# EAGLE board TMP006 Breakout Panel v10 (EAGLE 6.4), part 1 of 2
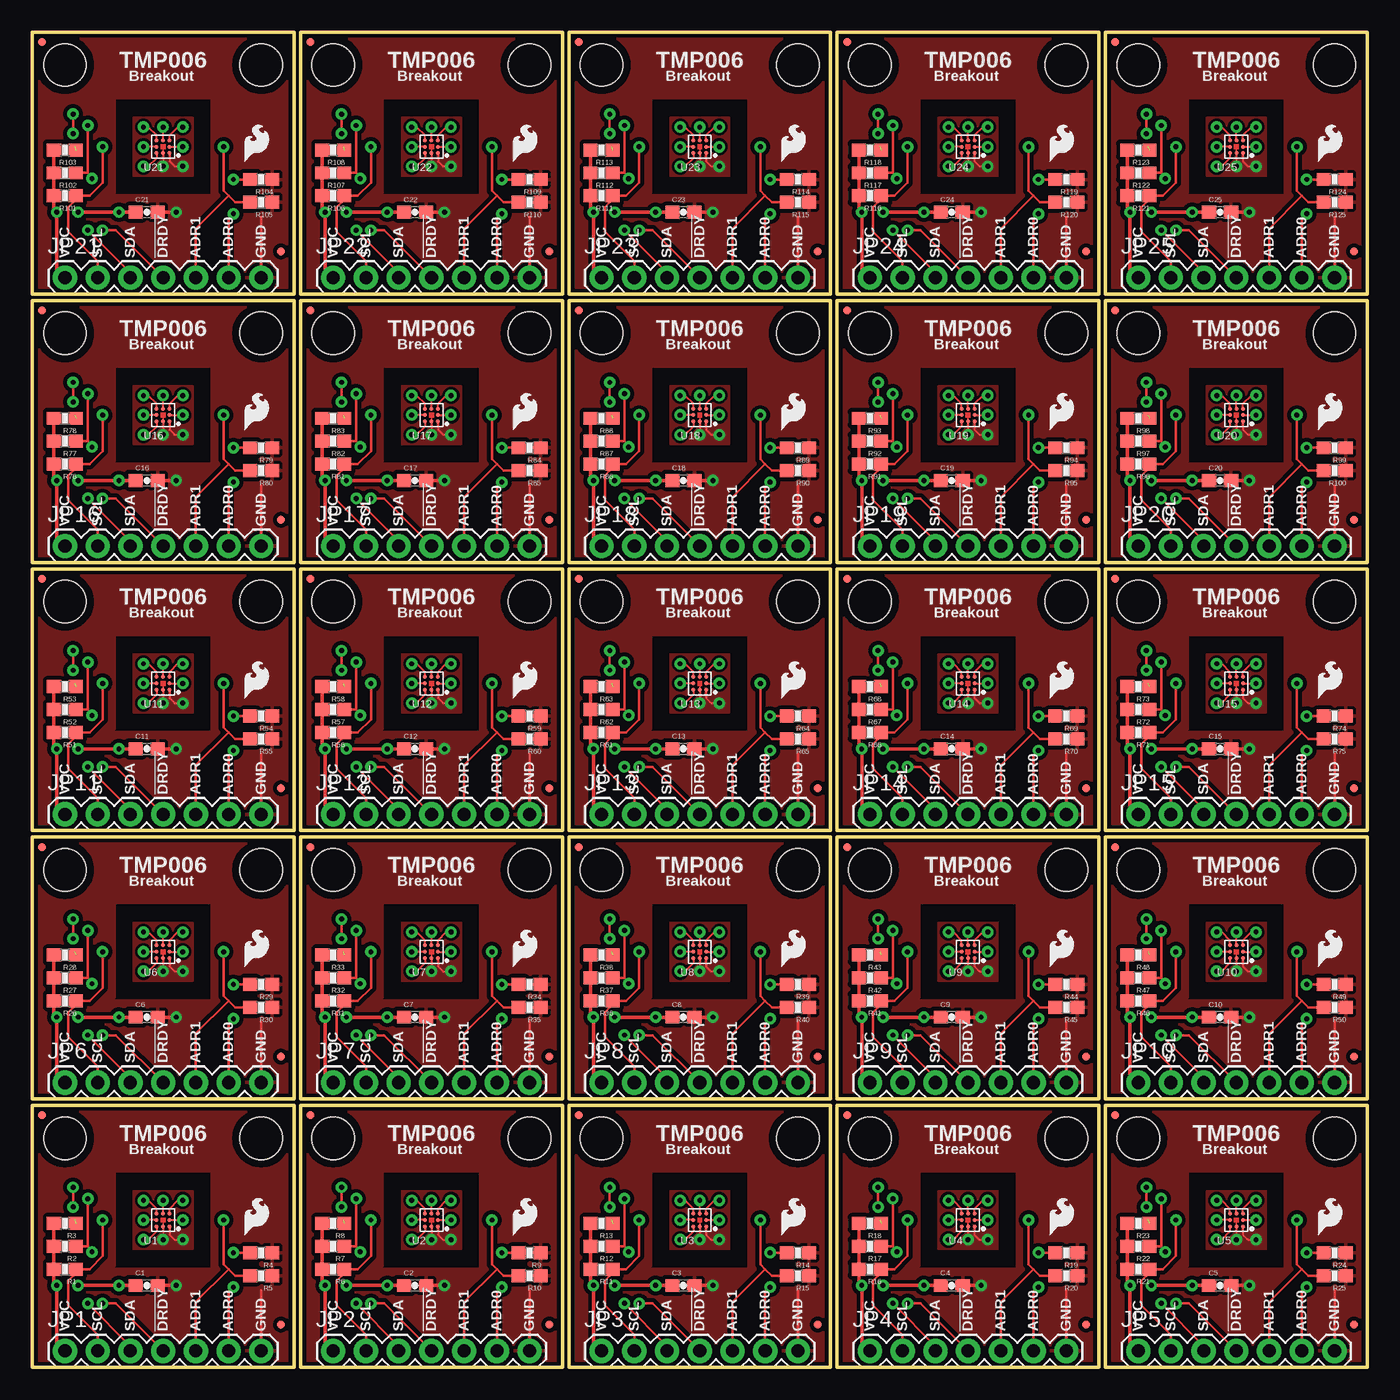
[diagram p0: board, top side]
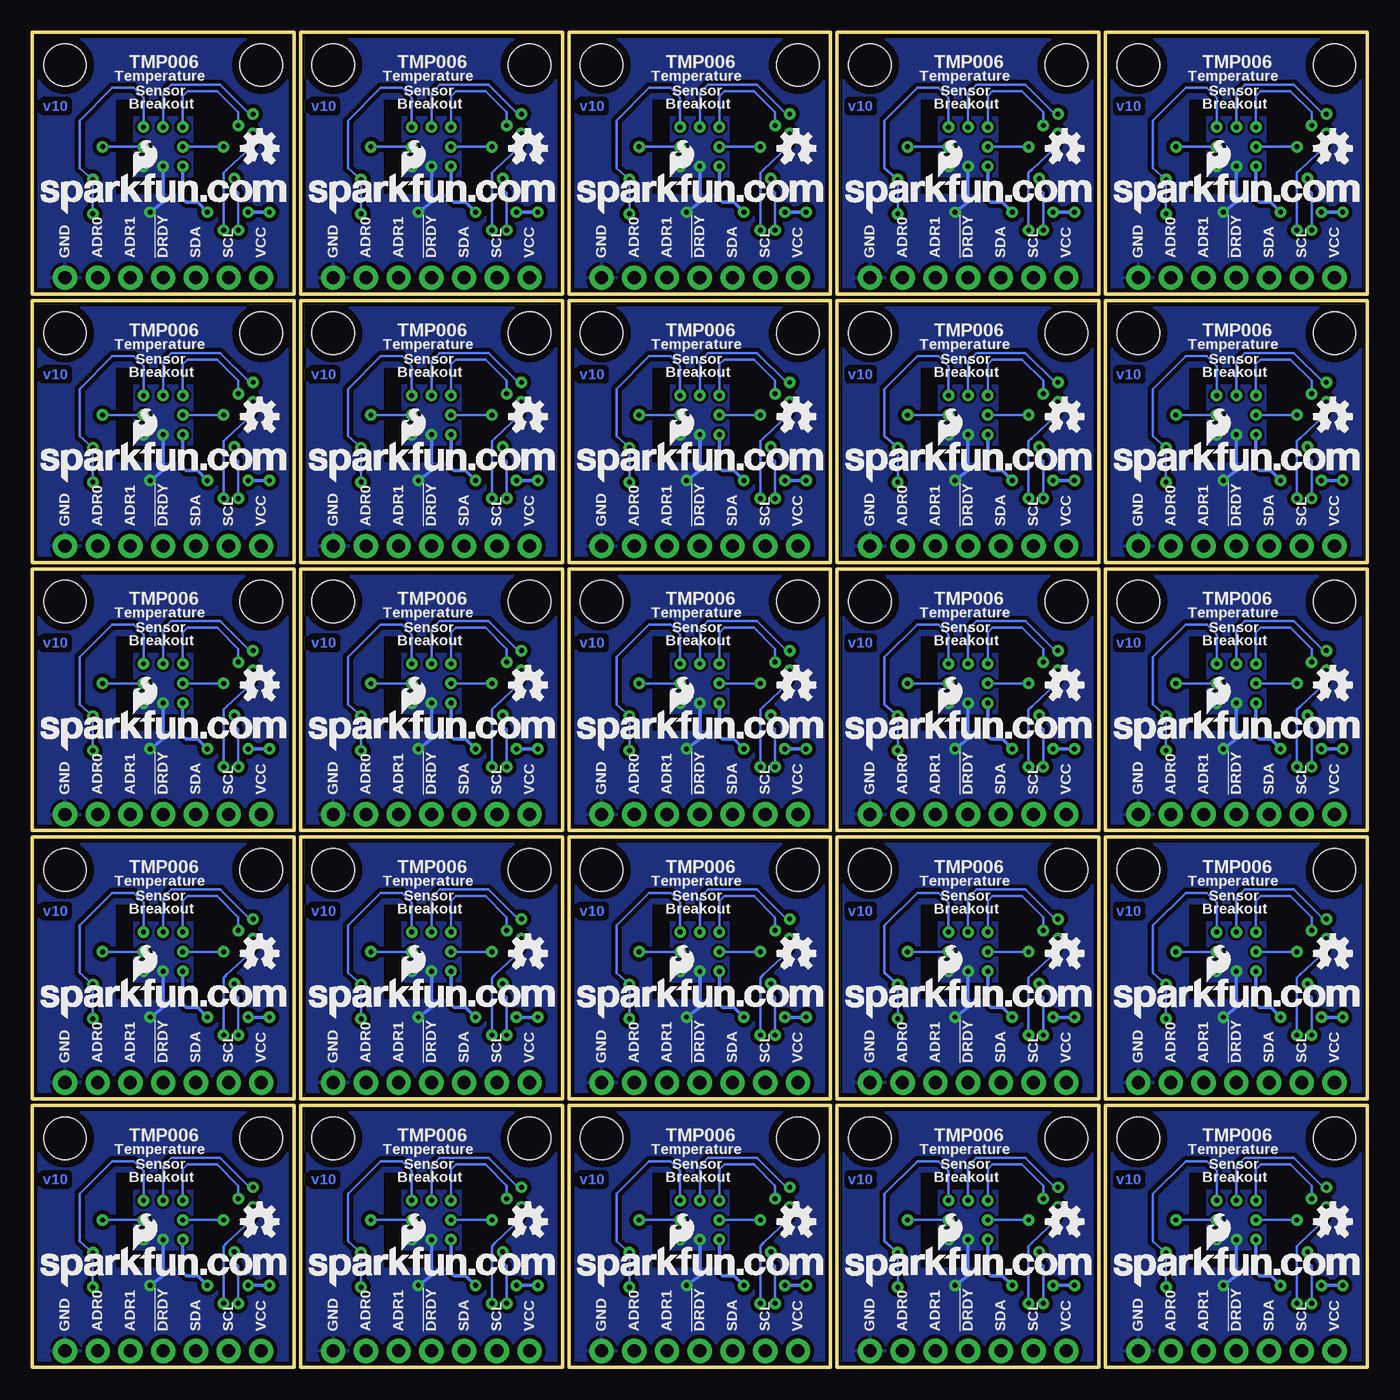
[diagram p1: board, bottom side, seen from below]

Size 103.63 x 103.63 mm. Coordinates in mm from the lower left corner, seen from the top.
Outline: 0,20.32 0,0 20.32,0 20.32,20.32 0,20.32
Outline: 20.83,20.32 20.83,0 41.15,0 41.15,20.32 20.83,20.32
Outline: 41.66,20.32 41.66,0 61.98,0 61.98,20.32 41.66,20.32
Outline: 62.48,20.32 62.48,0 82.8,0 82.8,20.32 62.48,20.32
Outline: 83.31,20.32 83.31,0 103.63,0 103.63,20.32 83.31,20.32
Outline: 0,41.15 0,20.83 20.32,20.83 20.32,41.15 0,41.15
Outline: 20.83,41.15 20.83,20.83 41.15,20.83 41.15,41.15 20.83,41.15
Outline: 41.66,41.15 41.66,20.83 61.98,20.83 61.98,41.15 41.66,41.15
Outline: 62.48,41.15 62.48,20.83 82.8,20.83 82.8,41.15 62.48,41.15
Outline: 83.31,41.15 83.31,20.83 103.63,20.83 103.63,41.15 83.31,41.15
Outline: 0,61.98 0,41.66 20.32,41.66 20.32,61.98 0,61.98
Outline: 20.83,61.98 20.83,41.66 41.15,41.66 41.15,61.98 20.83,61.98
Outline: 41.66,61.98 41.66,41.66 61.98,41.66 61.98,61.98 41.66,61.98
Outline: 62.48,61.98 62.48,41.66 82.8,41.66 82.8,61.98 62.48,61.98
Outline: 83.31,61.98 83.31,41.66 103.63,41.66 103.63,61.98 83.31,61.98
Outline: 0,82.8 0,62.48 20.32,62.48 20.32,82.8 0,82.8
Outline: 20.83,82.8 20.83,62.48 41.15,62.48 41.15,82.8 20.83,82.8
Outline: 41.66,82.8 41.66,62.48 61.98,62.48 61.98,82.8 41.66,82.8
Outline: 62.48,82.8 62.48,62.48 82.8,62.48 82.8,82.8 62.48,82.8
Outline: 83.31,82.8 83.31,62.48 103.63,62.48 103.63,82.8 83.31,82.8
Outline: 0,103.63 0,83.31 20.32,83.31 20.32,103.63 0,103.63
Outline: 20.83,103.63 20.83,83.31 41.15,83.31 41.15,103.63 20.83,103.63
Outline: 41.66,103.63 41.66,83.31 61.98,83.31 61.98,103.63 41.66,103.63
Outline: 62.48,103.63 62.48,83.31 82.8,83.31 82.8,103.63 62.48,103.63
Outline: 83.31,103.63 83.31,83.31 103.63,83.31 103.63,103.63 83.31,103.63
Copper layers (1*16): Top 0.035mm / dielectric 1.5mm / Bottom 0.035mm
Design rules "default": minimum track width 6mil, minimum drill 15mil, track to track 8mil, track to pad 8mil, pad to pad 8mil, via to via 8mil, smd to smd 8mil, copper to edge 8mil, drill to drill 8mil, minimum pad ring 12mil, minimum via ring 10mil, stop-mask expansion 4mil, vias tented up to drill 20mil, thermal gap 10mil
tRestrict: area 10.3,10.8 to 10.5,11; area 10.8,10.8 to 11,11; area 31.1,10.8 to 31.4,11; area 31.6,10.8 to 31.9,11; area 51.9,10.8 to 52.2,11; area 52.5,10.8 to 52.7,11; area 72.8,10.8 to 73,11; area 73.3,10.8 to 73.5,11; area 93.6,10.8 to 93.9,11; area 94.1,10.8 to 94.4,11; area 10.3,31.6 to 10.5,31.9; area 10.8,31.6 to 11,31.9; area 31.1,31.6 to 31.4,31.9; area 31.6,31.6 to 31.9,31.9; area 51.9,31.6 to 52.2,31.9; area 52.5,31.6 to 52.7,31.9; area 72.8,31.6 to 73,31.9; area 73.3,31.6 to 73.5,31.9; area 93.6,31.6 to 93.9,31.9; area 94.1,31.6 to 94.4,31.9; area 10.3,52.5 to 10.5,52.7; area 10.8,52.5 to 11,52.7; area 31.1,52.5 to 31.4,52.7; area 31.6,52.5 to 31.9,52.7; area 51.9,52.5 to 52.2,52.7; area 52.5,52.5 to 52.7,52.7; area 72.8,52.5 to 73,52.7; area 73.3,52.5 to 73.5,52.7; area 93.6,52.5 to 93.9,52.7; area 94.1,52.5 to 94.4,52.7; area 10.3,73.3 to 10.5,73.5; area 10.8,73.3 to 11,73.5; area 31.1,73.3 to 31.4,73.5; area 31.6,73.3 to 31.9,73.5; area 51.9,73.3 to 52.2,73.5; area 52.5,73.3 to 52.7,73.5; area 72.8,73.3 to 73,73.5; area 73.3,73.3 to 73.5,73.5; area 93.6,73.3 to 93.9,73.5; area 94.1,73.3 to 94.4,73.5; area 10.3,94.1 to 10.5,94.4; area 10.8,94.1 to 11,94.4; area 31.1,94.1 to 31.4,94.4; area 31.6,94.1 to 31.9,94.4; area 51.9,94.1 to 52.2,94.4; area 52.5,94.1 to 52.7,94.4; area 72.8,94.1 to 73,94.4; area 73.3,94.1 to 73.5,94.4; area 93.6,94.1 to 93.9,94.4; area 94.1,94.1 to 94.4,94.4

## Footprints (pad centres in the part's own frame; a part is rotated, then mirrored left to right if it is on the bottom)
0603-CAP = smd 1.1 x 1: 1 -0.85,0; 2 0.85,0
MICRO-FIDUCIAL = smd 0.635 x 0.635: 1 0,0
1X07 = drill 1.016 pad 1.88: 1 0,0; 2 2.54,0; 3 5.08,0; 4 7.62,0; 5 10.16,0; 6 12.7,0; 7 15.24,0
0603-RES = smd 1.1 x 1: 1 -0.85,0; 2 0.85,0
STAND-OFF = hole 3.302: 0,0
BGA8DS = smd 0.305 x 0.305: A1 0.5,-0.5; A2 0,-0.5; A3 -0.5,-0.5; B1 0.5,0; B3 -0.5,0; C1 0.5,0.5; C2 0,0.5; C3 -0.5,0.5

## Placement (x,y rotation side)
C1  0.1uF  [0603-CAP]  8.89,6.35 0 top
C2  0.1uF  [0603-CAP]  29.72,6.35 0 top
C3  0.1uF  [0603-CAP]  50.55,6.35 0 top
C4  0.1uF  [0603-CAP]  71.37,6.35 0 top
C5  0.1uF  [0603-CAP]  92.2,6.35 0 top
C6  0.1uF  [0603-CAP]  8.89,27.18 0 top
C7  0.1uF  [0603-CAP]  29.72,27.18 0 top
C8  0.1uF  [0603-CAP]  50.55,27.18 0 top
C9  0.1uF  [0603-CAP]  71.37,27.18 0 top
C10  0.1uF  [0603-CAP]  92.2,27.18 0 top
C11  0.1uF  [0603-CAP]  8.89,48.01 0 top
C12  0.1uF  [0603-CAP]  29.72,48.01 0 top
C13  0.1uF  [0603-CAP]  50.55,48.01 0 top
C14  0.1uF  [0603-CAP]  71.37,48.01 0 top
C15  0.1uF  [0603-CAP]  92.2,48.01 0 top
C16  0.1uF  [0603-CAP]  8.89,68.83 0 top
C17  0.1uF  [0603-CAP]  29.72,68.83 0 top
C18  0.1uF  [0603-CAP]  50.55,68.83 0 top
C19  0.1uF  [0603-CAP]  71.37,68.83 0 top
C20  0.1uF  [0603-CAP]  92.2,68.83 0 top
C21  0.1uF  [0603-CAP]  8.89,89.66 0 top
C22  0.1uF  [0603-CAP]  29.72,89.66 0 top
C23  0.1uF  [0603-CAP]  50.55,89.66 0 top
C24  0.1uF  [0603-CAP]  71.37,89.66 0 top
C25  0.1uF  [0603-CAP]  92.2,89.66 0 top
FID1  FIDUCIALUFIDUCIAL  [MICRO-FIDUCIAL]  19.3,3.3 0 top
FID2  FIDUCIALUFIDUCIAL  [MICRO-FIDUCIAL]  0.76,19.56 0 top
FID3  FIDUCIALUFIDUCIAL  [MICRO-FIDUCIAL]  40.13,3.3 0 top
FID4  FIDUCIALUFIDUCIAL  [MICRO-FIDUCIAL]  21.59,19.56 0 top
FID5  FIDUCIALUFIDUCIAL  [MICRO-FIDUCIAL]  60.96,3.3 0 top
FID6  FIDUCIALUFIDUCIAL  [MICRO-FIDUCIAL]  42.42,19.56 0 top
FID7  FIDUCIALUFIDUCIAL  [MICRO-FIDUCIAL]  81.79,3.3 0 top
FID8  FIDUCIALUFIDUCIAL  [MICRO-FIDUCIAL]  63.25,19.56 0 top
FID9  FIDUCIALUFIDUCIAL  [MICRO-FIDUCIAL]  102.62,3.3 0 top
FID10  FIDUCIALUFIDUCIAL  [MICRO-FIDUCIAL]  84.07,19.56 0 top
FID11  FIDUCIALUFIDUCIAL  [MICRO-FIDUCIAL]  19.3,24.13 0 top
FID12  FIDUCIALUFIDUCIAL  [MICRO-FIDUCIAL]  0.76,40.39 0 top
FID13  FIDUCIALUFIDUCIAL  [MICRO-FIDUCIAL]  40.13,24.13 0 top
FID14  FIDUCIALUFIDUCIAL  [MICRO-FIDUCIAL]  21.59,40.39 0 top
FID15  FIDUCIALUFIDUCIAL  [MICRO-FIDUCIAL]  60.96,24.13 0 top
FID16  FIDUCIALUFIDUCIAL  [MICRO-FIDUCIAL]  42.42,40.39 0 top
FID17  FIDUCIALUFIDUCIAL  [MICRO-FIDUCIAL]  81.79,24.13 0 top
FID18  FIDUCIALUFIDUCIAL  [MICRO-FIDUCIAL]  63.25,40.39 0 top
FID19  FIDUCIALUFIDUCIAL  [MICRO-FIDUCIAL]  102.62,24.13 0 top
FID20  FIDUCIALUFIDUCIAL  [MICRO-FIDUCIAL]  84.07,40.39 0 top
FID21  FIDUCIALUFIDUCIAL  [MICRO-FIDUCIAL]  19.3,44.96 0 top
FID22  FIDUCIALUFIDUCIAL  [MICRO-FIDUCIAL]  0.76,61.21 0 top
FID23  FIDUCIALUFIDUCIAL  [MICRO-FIDUCIAL]  40.13,44.96 0 top
FID24  FIDUCIALUFIDUCIAL  [MICRO-FIDUCIAL]  21.59,61.21 0 top
FID25  FIDUCIALUFIDUCIAL  [MICRO-FIDUCIAL]  60.96,44.96 0 top
FID26  FIDUCIALUFIDUCIAL  [MICRO-FIDUCIAL]  42.42,61.21 0 top
FID27  FIDUCIALUFIDUCIAL  [MICRO-FIDUCIAL]  81.79,44.96 0 top
FID28  FIDUCIALUFIDUCIAL  [MICRO-FIDUCIAL]  63.25,61.21 0 top
FID29  FIDUCIALUFIDUCIAL  [MICRO-FIDUCIAL]  102.62,44.96 0 top
FID30  FIDUCIALUFIDUCIAL  [MICRO-FIDUCIAL]  84.07,61.21 0 top
FID31  FIDUCIALUFIDUCIAL  [MICRO-FIDUCIAL]  19.3,65.79 0 top
FID32  FIDUCIALUFIDUCIAL  [MICRO-FIDUCIAL]  0.76,82.04 0 top
FID33  FIDUCIALUFIDUCIAL  [MICRO-FIDUCIAL]  40.13,65.79 0 top
FID34  FIDUCIALUFIDUCIAL  [MICRO-FIDUCIAL]  21.59,82.04 0 top
FID35  FIDUCIALUFIDUCIAL  [MICRO-FIDUCIAL]  60.96,65.79 0 top
FID36  FIDUCIALUFIDUCIAL  [MICRO-FIDUCIAL]  42.42,82.04 0 top
FID37  FIDUCIALUFIDUCIAL  [MICRO-FIDUCIAL]  81.79,65.79 0 top
FID38  FIDUCIALUFIDUCIAL  [MICRO-FIDUCIAL]  63.25,82.04 0 top
FID39  FIDUCIALUFIDUCIAL  [MICRO-FIDUCIAL]  102.62,65.79 0 top
FID40  FIDUCIALUFIDUCIAL  [MICRO-FIDUCIAL]  84.07,82.04 0 top
FID41  FIDUCIALUFIDUCIAL  [MICRO-FIDUCIAL]  19.3,86.61 0 top
FID42  FIDUCIALUFIDUCIAL  [MICRO-FIDUCIAL]  0.76,102.87 0 top
FID43  FIDUCIALUFIDUCIAL  [MICRO-FIDUCIAL]  40.13,86.61 0 top
FID44  FIDUCIALUFIDUCIAL  [MICRO-FIDUCIAL]  21.59,102.87 0 top
FID45  FIDUCIALUFIDUCIAL  [MICRO-FIDUCIAL]  60.96,86.61 0 top
FID46  FIDUCIALUFIDUCIAL  [MICRO-FIDUCIAL]  42.42,102.87 0 top
FID47  FIDUCIALUFIDUCIAL  [MICRO-FIDUCIAL]  81.79,86.61 0 top
FID48  FIDUCIALUFIDUCIAL  [MICRO-FIDUCIAL]  63.25,102.87 0 top
FID49  FIDUCIALUFIDUCIAL  [MICRO-FIDUCIAL]  102.62,86.61 0 top
FID50  FIDUCIALUFIDUCIAL  [MICRO-FIDUCIAL]  84.07,102.87 0 top
JP1  [1X07]  2.54,1.27 0 top
JP2  [1X07]  23.37,1.27 0 top
JP3  [1X07]  44.2,1.27 0 top
JP4  [1X07]  65.02,1.27 0 top
JP5  [1X07]  85.85,1.27 0 top
JP6  [1X07]  2.54,22.1 0 top
JP7  [1X07]  23.37,22.1 0 top
JP8  [1X07]  44.2,22.1 0 top
JP9  [1X07]  65.02,22.1 0 top
JP10  [1X07]  85.85,22.1 0 top
JP11  [1X07]  2.54,42.93 0 top
JP12  [1X07]  23.37,42.93 0 top
JP13  [1X07]  44.2,42.93 0 top
JP14  [1X07]  65.02,42.93 0 top
JP15  [1X07]  85.85,42.93 0 top
JP16  [1X07]  2.54,63.75 0 top
JP17  [1X07]  23.37,63.75 0 top
JP18  [1X07]  44.2,63.75 0 top
JP19  [1X07]  65.02,63.75 0 top
JP20  [1X07]  85.85,63.75 0 top
JP21  [1X07]  2.54,84.58 0 top
JP22  [1X07]  23.37,84.58 0 top
JP23  [1X07]  44.2,84.58 0 top
JP24  [1X07]  65.02,84.58 0 top
JP25  [1X07]  85.85,84.58 0 top
LOGO1  LOGO-SFESK  [SFE-LOGO-FLAME]  16.51,10.29 0 top
LOGO2  OSHW-LOGOS  [OSHW-LOGO-S]  2.67,11.3 0 bottom
LOGO3  LOGO-SFENEW  [SFE-NEW-WEBLOGO]  19.68,6.22 0 bottom
LOGO4  LOGO-SFESK  [SFE-LOGO-FLAME]  37.34,10.29 0 top
LOGO5  OSHW-LOGOS  [OSHW-LOGO-S]  23.5,11.3 0 bottom
LOGO6  LOGO-SFENEW  [SFE-NEW-WEBLOGO]  40.51,6.22 0 bottom
LOGO7  LOGO-SFESK  [SFE-LOGO-FLAME]  58.17,10.29 0 top
LOGO8  OSHW-LOGOS  [OSHW-LOGO-S]  44.32,11.3 0 bottom
LOGO9  LOGO-SFENEW  [SFE-NEW-WEBLOGO]  61.34,6.22 0 bottom
LOGO10  LOGO-SFESK  [SFE-LOGO-FLAME]  78.99,10.29 0 top
LOGO11  OSHW-LOGOS  [OSHW-LOGO-S]  65.15,11.3 0 bottom
LOGO12  LOGO-SFENEW  [SFE-NEW-WEBLOGO]  82.17,6.22 0 bottom
LOGO13  LOGO-SFESK  [SFE-LOGO-FLAME]  99.82,10.29 0 top
LOGO14  OSHW-LOGOS  [OSHW-LOGO-S]  85.98,11.3 0 bottom
LOGO15  LOGO-SFENEW  [SFE-NEW-WEBLOGO]  103,6.22 0 bottom
LOGO16  LOGO-SFESK  [SFE-LOGO-FLAME]  16.51,31.11 0 top
LOGO17  OSHW-LOGOS  [OSHW-LOGO-S]  2.67,32.13 0 bottom
LOGO18  LOGO-SFENEW  [SFE-NEW-WEBLOGO]  19.68,27.05 0 bottom
LOGO19  LOGO-SFESK  [SFE-LOGO-FLAME]  37.34,31.11 0 top
LOGO20  OSHW-LOGOS  [OSHW-LOGO-S]  23.5,32.13 0 bottom
LOGO21  LOGO-SFENEW  [SFE-NEW-WEBLOGO]  40.51,27.05 0 bottom
LOGO22  LOGO-SFESK  [SFE-LOGO-FLAME]  58.17,31.11 0 top
LOGO23  OSHW-LOGOS  [OSHW-LOGO-S]  44.32,32.13 0 bottom
LOGO24  LOGO-SFENEW  [SFE-NEW-WEBLOGO]  61.34,27.05 0 bottom
LOGO25  LOGO-SFESK  [SFE-LOGO-FLAME]  78.99,31.11 0 top
LOGO26  OSHW-LOGOS  [OSHW-LOGO-S]  65.15,32.13 0 bottom
LOGO27  LOGO-SFENEW  [SFE-NEW-WEBLOGO]  82.17,27.05 0 bottom
LOGO28  LOGO-SFESK  [SFE-LOGO-FLAME]  99.82,31.11 0 top
LOGO29  OSHW-LOGOS  [OSHW-LOGO-S]  85.98,32.13 0 bottom
LOGO30  LOGO-SFENEW  [SFE-NEW-WEBLOGO]  103,27.05 0 bottom
LOGO31  LOGO-SFESK  [SFE-LOGO-FLAME]  16.51,51.94 0 top
LOGO32  OSHW-LOGOS  [OSHW-LOGO-S]  2.67,52.96 0 bottom
LOGO33  LOGO-SFENEW  [SFE-NEW-WEBLOGO]  19.68,47.88 0 bottom
LOGO34  LOGO-SFESK  [SFE-LOGO-FLAME]  37.34,51.94 0 top
LOGO35  OSHW-LOGOS  [OSHW-LOGO-S]  23.5,52.96 0 bottom
LOGO36  LOGO-SFENEW  [SFE-NEW-WEBLOGO]  40.51,47.88 0 bottom
LOGO37  LOGO-SFESK  [SFE-LOGO-FLAME]  58.17,51.94 0 top
LOGO38  OSHW-LOGOS  [OSHW-LOGO-S]  44.32,52.96 0 bottom
LOGO39  LOGO-SFENEW  [SFE-NEW-WEBLOGO]  61.34,47.88 0 bottom
LOGO40  LOGO-SFESK  [SFE-LOGO-FLAME]  78.99,51.94 0 top
LOGO41  OSHW-LOGOS  [OSHW-LOGO-S]  65.15,52.96 0 bottom
LOGO42  LOGO-SFENEW  [SFE-NEW-WEBLOGO]  82.17,47.88 0 bottom
LOGO43  LOGO-SFESK  [SFE-LOGO-FLAME]  99.82,51.94 0 top
LOGO44  OSHW-LOGOS  [OSHW-LOGO-S]  85.98,52.96 0 bottom
LOGO45  LOGO-SFENEW  [SFE-NEW-WEBLOGO]  103,47.88 0 bottom
LOGO46  LOGO-SFESK  [SFE-LOGO-FLAME]  16.51,72.77 0 top
LOGO47  OSHW-LOGOS  [OSHW-LOGO-S]  2.67,73.79 0 bottom
LOGO48  LOGO-SFENEW  [SFE-NEW-WEBLOGO]  19.68,68.71 0 bottom
LOGO49  LOGO-SFESK  [SFE-LOGO-FLAME]  37.34,72.77 0 top
LOGO50  OSHW-LOGOS  [OSHW-LOGO-S]  23.5,73.79 0 bottom
LOGO51  LOGO-SFENEW  [SFE-NEW-WEBLOGO]  40.51,68.71 0 bottom
LOGO52  LOGO-SFESK  [SFE-LOGO-FLAME]  58.17,72.77 0 top
LOGO53  OSHW-LOGOS  [OSHW-LOGO-S]  44.32,73.79 0 bottom
LOGO54  LOGO-SFENEW  [SFE-NEW-WEBLOGO]  61.34,68.71 0 bottom
LOGO55  LOGO-SFESK  [SFE-LOGO-FLAME]  78.99,72.77 0 top
LOGO56  OSHW-LOGOS  [OSHW-LOGO-S]  65.15,73.79 0 bottom
LOGO57  LOGO-SFENEW  [SFE-NEW-WEBLOGO]  82.17,68.71 0 bottom
LOGO58  LOGO-SFESK  [SFE-LOGO-FLAME]  99.82,72.77 0 top
LOGO59  OSHW-LOGOS  [OSHW-LOGO-S]  85.98,73.79 0 bottom
LOGO60  LOGO-SFENEW  [SFE-NEW-WEBLOGO]  103,68.71 0 bottom
LOGO61  LOGO-SFESK  [SFE-LOGO-FLAME]  16.51,93.6 0 top
LOGO62  OSHW-LOGOS  [OSHW-LOGO-S]  2.67,94.61 0 bottom
LOGO63  LOGO-SFENEW  [SFE-NEW-WEBLOGO]  19.68,89.53 0 bottom
LOGO64  LOGO-SFESK  [SFE-LOGO-FLAME]  37.34,93.6 0 top
LOGO65  OSHW-LOGOS  [OSHW-LOGO-S]  23.5,94.61 0 bottom
LOGO66  LOGO-SFENEW  [SFE-NEW-WEBLOGO]  40.51,89.53 0 bottom
LOGO67  LOGO-SFESK  [SFE-LOGO-FLAME]  58.17,93.6 0 top
LOGO68  OSHW-LOGOS  [OSHW-LOGO-S]  44.32,94.61 0 bottom
LOGO69  LOGO-SFENEW  [SFE-NEW-WEBLOGO]  61.34,89.53 0 bottom
LOGO70  LOGO-SFESK  [SFE-LOGO-FLAME]  78.99,93.6 0 top
LOGO71  OSHW-LOGOS  [OSHW-LOGO-S]  65.15,94.61 0 bottom
LOGO72  LOGO-SFENEW  [SFE-NEW-WEBLOGO]  82.17,89.53 0 bottom
LOGO73  LOGO-SFESK  [SFE-LOGO-FLAME]  99.82,93.6 0 top
LOGO74  OSHW-LOGOS  [OSHW-LOGO-S]  85.98,94.61 0 bottom
LOGO75  LOGO-SFENEW  [SFE-NEW-WEBLOGO]  103,89.53 0 bottom
R1  10k  [0603-RES]  2.54,7.62 180 top
R2  10k  [0603-RES]  2.54,9.4 180 top
R3  10k  [0603-RES]  2.54,11.18 180 top
R4  10k  [0603-RES]  17.78,8.89 180 top
R5  10k  [0603-RES]  17.78,7.11 180 top
R6  10k  [0603-RES]  23.37,7.62 180 top
R7  10k  [0603-RES]  23.37,9.4 180 top
R8  10k  [0603-RES]  23.37,11.18 180 top
R9  10k  [0603-RES]  38.61,8.89 180 top
R10  10k  [0603-RES]  38.61,7.11 180 top
R11  10k  [0603-RES]  44.2,7.62 180 top
R12  10k  [0603-RES]  44.2,9.4 180 top
R13  10k  [0603-RES]  44.2,11.18 180 top
R14  10k  [0603-RES]  59.44,8.89 180 top
R15  10k  [0603-RES]  59.44,7.11 180 top
R16  10k  [0603-RES]  65.02,7.62 180 top
R17  10k  [0603-RES]  65.02,9.4 180 top
R18  10k  [0603-RES]  65.02,11.18 180 top
R19  10k  [0603-RES]  80.26,8.89 180 top
R20  10k  [0603-RES]  80.26,7.11 180 top
R21  10k  [0603-RES]  85.85,7.62 180 top
R22  10k  [0603-RES]  85.85,9.4 180 top
R23  10k  [0603-RES]  85.85,11.18 180 top
R24  10k  [0603-RES]  101.09,8.89 180 top
R25  10k  [0603-RES]  101.09,7.11 180 top
R26  10k  [0603-RES]  2.54,28.45 180 top
R27  10k  [0603-RES]  2.54,30.23 180 top
R28  10k  [0603-RES]  2.54,32 180 top
R29  10k  [0603-RES]  17.78,29.72 180 top
R30  10k  [0603-RES]  17.78,27.94 180 top
R31  10k  [0603-RES]  23.37,28.45 180 top
R32  10k  [0603-RES]  23.37,30.23 180 top
R33  10k  [0603-RES]  23.37,32 180 top
R34  10k  [0603-RES]  38.61,29.72 180 top
R35  10k  [0603-RES]  38.61,27.94 180 top
R36  10k  [0603-RES]  44.2,28.45 180 top
R37  10k  [0603-RES]  44.2,30.23 180 top
R38  10k  [0603-RES]  44.2,32 180 top
R39  10k  [0603-RES]  59.44,29.72 180 top
R40  10k  [0603-RES]  59.44,27.94 180 top
R41  10k  [0603-RES]  65.02,28.45 180 top
R42  10k  [0603-RES]  65.02,30.23 180 top
R43  10k  [0603-RES]  65.02,32 180 top
R44  10k  [0603-RES]  80.26,29.72 180 top
R45  10k  [0603-RES]  80.26,27.94 180 top
R46  10k  [0603-RES]  85.85,28.45 180 top
R47  10k  [0603-RES]  85.85,30.23 180 top
R48  10k  [0603-RES]  85.85,32 180 top
R49  10k  [0603-RES]  101.09,29.72 180 top
R50  10k  [0603-RES]  101.09,27.94 180 top
R51  10k  [0603-RES]  2.54,49.28 180 top
R52  10k  [0603-RES]  2.54,51.05 180 top
R53  10k  [0603-RES]  2.54,52.83 180 top
R54  10k  [0603-RES]  17.78,50.55 180 top
R55  10k  [0603-RES]  17.78,48.77 180 top
R56  10k  [0603-RES]  23.37,49.28 180 top
R57  10k  [0603-RES]  23.37,51.05 180 top
R58  10k  [0603-RES]  23.37,52.83 180 top
R59  10k  [0603-RES]  38.61,50.55 180 top
R60  10k  [0603-RES]  38.61,48.77 180 top
R61  10k  [0603-RES]  44.2,49.28 180 top
R62  10k  [0603-RES]  44.2,51.05 180 top
R63  10k  [0603-RES]  44.2,52.83 180 top
R64  10k  [0603-RES]  59.44,50.55 180 top
R65  10k  [0603-RES]  59.44,48.77 180 top
R66  10k  [0603-RES]  65.02,49.28 180 top
R67  10k  [0603-RES]  65.02,51.05 180 top
R68  10k  [0603-RES]  65.02,52.83 180 top
R69  10k  [0603-RES]  80.26,50.55 180 top
R70  10k  [0603-RES]  80.26,48.77 180 top
R71  10k  [0603-RES]  85.85,49.28 180 top
R72  10k  [0603-RES]  85.85,51.05 180 top
R73  10k  [0603-RES]  85.85,52.83 180 top
R74  10k  [0603-RES]  101.09,50.55 180 top
R75  10k  [0603-RES]  101.09,48.77 180 top
R76  10k  [0603-RES]  2.54,70.1 180 top
R77  10k  [0603-RES]  2.54,71.88 180 top
R78  10k  [0603-RES]  2.54,73.66 180 top
R79  10k  [0603-RES]  17.78,71.37 180 top
R80  10k  [0603-RES]  17.78,69.6 180 top
R81  10k  [0603-RES]  23.37,70.1 180 top
R82  10k  [0603-RES]  23.37,71.88 180 top
R83  10k  [0603-RES]  23.37,73.66 180 top
R84  10k  [0603-RES]  38.61,71.37 180 top
R85  10k  [0603-RES]  38.61,69.6 180 top
R86  10k  [0603-RES]  44.2,70.1 180 top
R87  10k  [0603-RES]  44.2,71.88 180 top
R88  10k  [0603-RES]  44.2,73.66 180 top
R89  10k  [0603-RES]  59.44,71.37 180 top
R90  10k  [0603-RES]  59.44,69.6 180 top
R91  10k  [0603-RES]  65.02,70.1 180 top
R92  10k  [0603-RES]  65.02,71.88 180 top
R93  10k  [0603-RES]  65.02,73.66 180 top
R94  10k  [0603-RES]  80.26,71.37 180 top
R95  10k  [0603-RES]  80.26,69.6 180 top
R96  10k  [0603-RES]  85.85,70.1 180 top
R97  10k  [0603-RES]  85.85,71.88 180 top
R98  10k  [0603-RES]  85.85,73.66 180 top
R99  10k  [0603-RES]  101.09,71.37 180 top
R100  10k  [0603-RES]  101.09,69.6 180 top
R101  10k  [0603-RES]  2.54,90.93 180 top
R102  10k  [0603-RES]  2.54,92.71 180 top
R103  10k  [0603-RES]  2.54,94.49 180 top
R104  10k  [0603-RES]  17.78,92.2 180 top
R105  10k  [0603-RES]  17.78,90.42 180 top
R106  10k  [0603-RES]  23.37,90.93 180 top
R107  10k  [0603-RES]  23.37,92.71 180 top
R108  10k  [0603-RES]  23.37,94.49 180 top
R109  10k  [0603-RES]  38.61,92.2 180 top
R110  10k  [0603-RES]  38.61,90.42 180 top
R111  10k  [0603-RES]  44.2,90.93 180 top
R112  10k  [0603-RES]  44.2,92.71 180 top
R113  10k  [0603-RES]  44.2,94.49 180 top
R114  10k  [0603-RES]  59.44,92.2 180 top
R115  10k  [0603-RES]  59.44,90.42 180 top
R116  10k  [0603-RES]  65.02,90.93 180 top
R117  10k  [0603-RES]  65.02,92.71 180 top
R118  10k  [0603-RES]  65.02,94.49 180 top
R119  10k  [0603-RES]  80.26,92.2 180 top
R120  10k  [0603-RES]  80.26,90.42 180 top
R121  10k  [0603-RES]  85.85,90.93 180 top
R122  10k  [0603-RES]  85.85,92.71 180 top
R123  10k  [0603-RES]  85.85,94.49 180 top
R124  10k  [0603-RES]  101.09,92.2 180 top
R125  10k  [0603-RES]  101.09,90.42 180 top
STANDOFF1  STAND-OFF  [STAND-OFF]  2.54,17.78 0 top
STANDOFF2  STAND-OFF  [STAND-OFF]  17.78,17.78 0 top
STANDOFF3  STAND-OFF  [STAND-OFF]  23.37,17.78 0 top
STANDOFF4  STAND-OFF  [STAND-OFF]  38.61,17.78 0 top
STANDOFF5  STAND-OFF  [STAND-OFF]  44.2,17.78 0 top
STANDOFF6  STAND-OFF  [STAND-OFF]  59.44,17.78 0 top
STANDOFF7  STAND-OFF  [STAND-OFF]  65.02,17.78 0 top
STANDOFF8  STAND-OFF  [STAND-OFF]  80.26,17.78 0 top
STANDOFF9  STAND-OFF  [STAND-OFF]  85.85,17.78 0 top
STANDOFF10  STAND-OFF  [STAND-OFF]  101.09,17.78 0 top
STANDOFF11  STAND-OFF  [STAND-OFF]  2.54,38.61 0 top
STANDOFF12  STAND-OFF  [STAND-OFF]  17.78,38.61 0 top
STANDOFF13  STAND-OFF  [STAND-OFF]  23.37,38.61 0 top
STANDOFF14  STAND-OFF  [STAND-OFF]  38.61,38.61 0 top
STANDOFF15  STAND-OFF  [STAND-OFF]  44.2,38.61 0 top
STANDOFF16  STAND-OFF  [STAND-OFF]  59.44,38.61 0 top
STANDOFF17  STAND-OFF  [STAND-OFF]  65.02,38.61 0 top
STANDOFF18  STAND-OFF  [STAND-OFF]  80.26,38.61 0 top
STANDOFF19  STAND-OFF  [STAND-OFF]  85.85,38.61 0 top
STANDOFF20  STAND-OFF  [STAND-OFF]  101.09,38.61 0 top
STANDOFF21  STAND-OFF  [STAND-OFF]  2.54,59.44 0 top
STANDOFF22  STAND-OFF  [STAND-OFF]  17.78,59.44 0 top
STANDOFF23  STAND-OFF  [STAND-OFF]  23.37,59.44 0 top
STANDOFF24  STAND-OFF  [STAND-OFF]  38.61,59.44 0 top
STANDOFF25  STAND-OFF  [STAND-OFF]  44.2,59.44 0 top
STANDOFF26  STAND-OFF  [STAND-OFF]  59.44,59.44 0 top
STANDOFF27  STAND-OFF  [STAND-OFF]  65.02,59.44 0 top
STANDOFF28  STAND-OFF  [STAND-OFF]  80.26,59.44 0 top
STANDOFF29  STAND-OFF  [STAND-OFF]  85.85,59.44 0 top
STANDOFF30  STAND-OFF  [STAND-OFF]  101.09,59.44 0 top
STANDOFF31  STAND-OFF  [STAND-OFF]  2.54,80.26 0 top
STANDOFF32  STAND-OFF  [STAND-OFF]  17.78,80.26 0 top
STANDOFF33  STAND-OFF  [STAND-OFF]  23.37,80.26 0 top
STANDOFF34  STAND-OFF  [STAND-OFF]  38.61,80.26 0 top
STANDOFF35  STAND-OFF  [STAND-OFF]  44.2,80.26 0 top
STANDOFF36  STAND-OFF  [STAND-OFF]  59.44,80.26 0 top
STANDOFF37  STAND-OFF  [STAND-OFF]  65.02,80.26 0 top
STANDOFF38  STAND-OFF  [STAND-OFF]  80.26,80.26 0 top
STANDOFF39  STAND-OFF  [STAND-OFF]  85.85,80.26 0 top
STANDOFF40  STAND-OFF  [STAND-OFF]  101.09,80.26 0 top
STANDOFF41  STAND-OFF  [STAND-OFF]  2.54,101.09 0 top
STANDOFF42  STAND-OFF  [STAND-OFF]  17.78,101.09 0 top
STANDOFF43  STAND-OFF  [STAND-OFF]  23.37,101.09 0 top
STANDOFF44  STAND-OFF  [STAND-OFF]  38.61,101.09 0 top
STANDOFF45  STAND-OFF  [STAND-OFF]  44.2,101.09 0 top
STANDOFF46  STAND-OFF  [STAND-OFF]  59.44,101.09 0 top
STANDOFF47  STAND-OFF  [STAND-OFF]  65.02,101.09 0 top
STANDOFF48  STAND-OFF  [STAND-OFF]  80.26,101.09 0 top
STANDOFF49  STAND-OFF  [STAND-OFF]  85.85,101.09 0 top
STANDOFF50  STAND-OFF  [STAND-OFF]  101.09,101.09 0 top
U1  TMP006  [BGA8DS]  10.16,11.43 0 top
U2  TMP006  [BGA8DS]  30.99,11.43 0 top
U3  TMP006  [BGA8DS]  51.82,11.43 0 top
U4  TMP006  [BGA8DS]  72.64,11.43 0 top
U5  TMP006  [BGA8DS]  93.47,11.43 0 top
U6  TMP006  [BGA8DS]  10.16,32.26 0 top
U7  TMP006  [BGA8DS]  30.99,32.26 0 top
U8  TMP006  [BGA8DS]  51.82,32.26 0 top
U9  TMP006  [BGA8DS]  72.64,32.26 0 top
U10  TMP006  [BGA8DS]  93.47,32.26 0 top
U11  TMP006  [BGA8DS]  10.16,53.09 0 top
U12  TMP006  [BGA8DS]  30.99,53.09 0 top
U13  TMP006  [BGA8DS]  51.82,53.09 0 top
U14  TMP006  [BGA8DS]  72.64,53.09 0 top
U15  TMP006  [BGA8DS]  93.47,53.09 0 top
U16  TMP006  [BGA8DS]  10.16,73.91 0 top
U17  TMP006  [BGA8DS]  30.99,73.91 0 top
U18  TMP006  [BGA8DS]  51.82,73.91 0 top
U19  TMP006  [BGA8DS]  72.64,73.91 0 top
U20  TMP006  [BGA8DS]  93.47,73.91 0 top
U21  TMP006  [BGA8DS]  10.16,94.74 0 top
U22  TMP006  [BGA8DS]  30.99,94.74 0 top
U23  TMP006  [BGA8DS]  51.82,94.74 0 top
U24  TMP006  [BGA8DS]  72.64,94.74 0 top
U25  TMP006  [BGA8DS]  93.47,94.74 0 top

## Library data of the parts
C1-C25 = SparkFun-Capacitors
FID1-FID50 LOGO1-LOGO75 = SparkFun-Aesthetics
JP1-JP25 = SparkFun-Connectors
R1-R125 = SparkFun-Resistors
STANDOFF1-STANDOFF50 = SparkFun-Electromechanical
U1-U25 = SparkFun-DigitalIC

## Nets
!DRDY: JP1.4 R3.1 U1.C2
!DRDY1: JP2.4 R8.1 U2.C2
!DRDY2: JP3.4 R13.1 U3.C2
!DRDY3: JP4.4 R18.1 U4.C2
!DRDY4: JP5.4 R23.1 U5.C2
!DRDY5: JP6.4 R28.1 U6.C2
!DRDY6: JP7.4 R33.1 U7.C2
!DRDY7: JP8.4 R38.1 U8.C2
!DRDY8: JP9.4 R43.1 U9.C2
!DRDY9: JP10.4 R48.1 U10.C2
!DRDY10: JP11.4 R53.1 U11.C2
!DRDY11: JP12.4 R58.1 U12.C2
!DRDY12: JP13.4 R63.1 U13.C2
!DRDY13: JP14.4 R68.1 U14.C2
!DRDY14: JP15.4 R73.1 U15.C2
!DRDY15: JP16.4 R78.1 U16.C2
!DRDY16: JP17.4 R83.1 U17.C2
!DRDY17: JP18.4 R88.1 U18.C2
!DRDY18: JP19.4 R93.1 U19.C2
!DRDY19: JP20.4 R98.1 U20.C2
!DRDY20: JP21.4 R103.1 U21.C2
!DRDY21: JP22.4 R108.1 U22.C2
!DRDY22: JP23.4 R113.1 U23.C2
!DRDY23: JP24.4 R118.1 U24.C2
!DRDY24: JP25.4 R123.1 U25.C2
ADR0: JP1.6 R4.2 U1.C1
ADR1: JP1.5 R5.2 U1.B1
ADR2: JP2.6 R9.2 U2.C1
ADR3: JP2.5 R10.2 U2.B1
ADR4: JP3.6 R14.2 U3.C1
ADR5: JP3.5 R15.2 U3.B1
ADR6: JP4.6 R19.2 U4.C1
ADR7: JP4.5 R20.2 U4.B1
ADR8: JP5.6 R24.2 U5.C1
ADR9: JP5.5 R25.2 U5.B1
ADR10: JP6.6 R29.2 U6.C1
ADR11: JP6.5 R30.2 U6.B1
ADR12: JP7.6 R34.2 U7.C1
ADR13: JP7.5 R35.2 U7.B1
ADR14: JP8.6 R39.2 U8.C1
ADR15: JP8.5 R40.2 U8.B1
ADR16: JP9.6 R44.2 U9.C1
ADR17: JP9.5 R45.2 U9.B1
ADR18: JP10.6 R49.2 U10.C1
ADR19: JP10.5 R50.2 U10.B1
ADR20: JP11.6 R54.2 U11.C1
ADR21: JP11.5 R55.2 U11.B1
ADR22: JP12.6 R59.2 U12.C1
ADR23: JP12.5 R60.2 U12.B1
ADR24: JP13.6 R64.2 U13.C1
ADR25: JP13.5 R65.2 U13.B1
ADR26: JP14.6 R69.2 U14.C1
ADR27: JP14.5 R70.2 U14.B1
ADR28: JP15.6 R74.2 U15.C1
ADR29: JP15.5 R75.2 U15.B1
ADR30: JP16.6 R79.2 U16.C1
ADR31: JP16.5 R80.2 U16.B1
ADR32: JP17.6 R84.2 U17.C1
ADR33: JP17.5 R85.2 U17.B1
ADR34: JP18.6 R89.2 U18.C1
ADR35: JP18.5 R90.2 U18.B1
ADR36: JP19.6 R94.2 U19.C1
ADR37: JP19.5 R95.2 U19.B1
ADR38: JP20.6 R99.2 U20.C1
ADR39: JP20.5 R100.2 U20.B1
ADR40: JP21.6 R104.2 U21.C1
ADR41: JP21.5 R105.2 U21.B1
ADR42: JP22.6 R109.2 U22.C1
ADR43: JP22.5 R110.2 U22.B1
ADR44: JP23.6 R114.2 U23.C1
ADR45: JP23.5 R115.2 U23.B1
ADR46: JP24.6 R119.2 U24.C1
ADR47: JP24.5 R120.2 U24.B1
ADR48: JP25.6 R124.2 U25.C1
ADR49: JP25.5 R125.2 U25.B1
GND: C1.2 JP1.7 R4.1 R5.1 U1.A1 U1.A2
GND1: C2.2 JP2.7 R9.1 R10.1 U2.A1 U2.A2
GND2: C3.2 JP3.7 R14.1 R15.1 U3.A1 U3.A2
GND3: C4.2 JP4.7 R19.1 R20.1 U4.A1 U4.A2
GND4: C5.2 JP5.7 R24.1 R25.1 U5.A1 U5.A2
GND5: C6.2 JP6.7 R29.1 R30.1 U6.A1 U6.A2
GND6: C7.2 JP7.7 R34.1 R35.1 U7.A1 U7.A2
GND7: C8.2 JP8.7 R39.1 R40.1 U8.A1 U8.A2
GND8: C9.2 JP9.7 R44.1 R45.1 U9.A1 U9.A2
GND9: C10.2 JP10.7 R49.1 R50.1 U10.A1 U10.A2
GND10: C11.2 JP11.7 R54.1 R55.1 U11.A1 U11.A2
GND11: C12.2 JP12.7 R59.1 R60.1 U12.A1 U12.A2
GND12: C13.2 JP13.7 R64.1 R65.1 U13.A1 U13.A2
GND13: C14.2 JP14.7 R69.1 R70.1 U14.A1 U14.A2
GND14: C15.2 JP15.7 R74.1 R75.1 U15.A1 U15.A2
GND15: C16.2 JP16.7 R79.1 R80.1 U16.A1 U16.A2
GND16: C17.2 JP17.7 R84.1 R85.1 U17.A1 U17.A2
GND17: C18.2 JP18.7 R89.1 R90.1 U18.A1 U18.A2
GND18: C19.2 JP19.7 R94.1 R95.1 U19.A1 U19.A2
GND19: C20.2 JP20.7 R99.1 R100.1 U20.A1 U20.A2
GND20: C21.2 JP21.7 R104.1 R105.1 U21.A1 U21.A2
GND21: C22.2 JP22.7 R109.1 R110.1 U22.A1 U22.A2
GND22: C23.2 JP23.7 R114.1 R115.1 U23.A1 U23.A2
GND23: C24.2 JP24.7 R119.1 R120.1 U24.A1 U24.A2
GND24: C25.2 JP25.7 R124.1 R125.1 U25.A1 U25.A2
SCL: JP1.2 R1.1 U1.B3
SCL1: JP2.2 R6.1 U2.B3
SCL2: JP3.2 R11.1 U3.B3
SCL3: JP4.2 R16.1 U4.B3
SCL4: JP5.2 R21.1 U5.B3
SCL5: JP6.2 R26.1 U6.B3
SCL6: JP7.2 R31.1 U7.B3
SCL7: JP8.2 R36.1 U8.B3
SCL8: JP9.2 R41.1 U9.B3
SCL9: JP10.2 R46.1 U10.B3
SCL10: JP11.2 R51.1 U11.B3
SCL11: JP12.2 R56.1 U12.B3
SCL12: JP13.2 R61.1 U13.B3
SCL13: JP14.2 R66.1 U14.B3
SCL14: JP15.2 R71.1 U15.B3
SCL15: JP16.2 R76.1 U16.B3
SCL16: JP17.2 R81.1 U17.B3
SCL17: JP18.2 R86.1 U18.B3
SCL18: JP19.2 R91.1 U19.B3
SCL19: JP20.2 R96.1 U20.B3
SCL20: JP21.2 R101.1 U21.B3
SCL21: JP22.2 R106.1 U22.B3
SCL22: JP23.2 R111.1 U23.B3
SCL23: JP24.2 R116.1 U24.B3
SCL24: JP25.2 R121.1 U25.B3
SDA: JP1.3 R2.1 U1.C3
SDA1: JP2.3 R7.1 U2.C3
SDA2: JP3.3 R12.1 U3.C3
SDA3: JP4.3 R17.1 U4.C3
SDA4: JP5.3 R22.1 U5.C3
SDA5: JP6.3 R27.1 U6.C3
SDA6: JP7.3 R32.1 U7.C3
SDA7: JP8.3 R37.1 U8.C3
SDA8: JP9.3 R42.1 U9.C3
SDA9: JP10.3 R47.1 U10.C3
SDA10: JP11.3 R52.1 U11.C3
SDA11: JP12.3 R57.1 U12.C3
SDA12: JP13.3 R62.1 U13.C3
SDA13: JP14.3 R67.1 U14.C3
SDA14: JP15.3 R72.1 U15.C3
SDA15: JP16.3 R77.1 U16.C3
SDA16: JP17.3 R82.1 U17.C3
SDA17: JP18.3 R87.1 U18.C3
SDA18: JP19.3 R92.1 U19.C3
SDA19: JP20.3 R97.1 U20.C3
SDA20: JP21.3 R102.1 U21.C3
SDA21: JP22.3 R107.1 U22.C3
SDA22: JP23.3 R112.1 U23.C3
SDA23: JP24.3 R117.1 U24.C3
SDA24: JP25.3 R122.1 U25.C3
VCC: C1.1 JP1.1 R1.2 R2.2 R3.2 U1.A3
VCC1: C2.1 JP2.1 R6.2 R7.2 R8.2 U2.A3
VCC2: C3.1 JP3.1 R11.2 R12.2 R13.2 U3.A3
VCC3: C4.1 JP4.1 R16.2 R17.2 R18.2 U4.A3
VCC4: C5.1 JP5.1 R21.2 R22.2 R23.2 U5.A3
VCC5: C6.1 JP6.1 R26.2 R27.2 R28.2 U6.A3
VCC6: C7.1 JP7.1 R31.2 R32.2 R33.2 U7.A3
VCC7: C8.1 JP8.1 R36.2 R37.2 R38.2 U8.A3
VCC8: C9.1 JP9.1 R41.2 R42.2 R43.2 U9.A3
VCC9: C10.1 JP10.1 R46.2 R47.2 R48.2 U10.A3
VCC10: C11.1 JP11.1 R51.2 R52.2 R53.2 U11.A3
VCC11: C12.1 JP12.1 R56.2 R57.2 R58.2 U12.A3
VCC12: C13.1 JP13.1 R61.2 R62.2 R63.2 U13.A3
VCC13: C14.1 JP14.1 R66.2 R67.2 R68.2 U14.A3
VCC14: C15.1 JP15.1 R71.2 R72.2 R73.2 U15.A3
VCC15: C16.1 JP16.1 R76.2 R77.2 R78.2 U16.A3
VCC16: C17.1 JP17.1 R81.2 R82.2 R83.2 U17.A3
VCC17: C18.1 JP18.1 R86.2 R87.2 R88.2 U18.A3
VCC18: C19.1 JP19.1 R91.2 R92.2 R93.2 U19.A3
VCC19: C20.1 JP20.1 R96.2 R97.2 R98.2 U20.A3
VCC20: C21.1 JP21.1 R101.2 R102.2 R103.2 U21.A3
VCC21: C22.1 JP22.1 R106.2 R107.2 R108.2 U22.A3
VCC22: C23.1 JP23.1 R111.2 R112.2 R113.2 U23.A3
VCC23: C24.1 JP24.1 R116.2 R117.2 R118.2 U24.A3
VCC24: C25.1 JP25.1 R121.2 R122.2 R123.2 U25.A3

## Tracks (layer width: path | path; a pad name or v marks a point on that pad's centre or on a via)
!DRDY  (via drill 0.38)  (1 unrouted)
  Top 0.152: U1.C2 v10.16,12.95
  Top 0.203: v3.17,13.97 v3.17,12.45 | v5.46,4.95 6.48,4.95 JP1.4
  Bottom 0.203: v10.16,12.95 10.16,15.62 9.53,16.26 5.71,16.26 3.43,13.97 v3.17,13.97 | v5.46,4.95 5.46,9.4 5.21,9.65 3.3,11.43 3.17,11.56 v3.17,12.45
!DRDY1  (via drill 0.38)  (1 unrouted)
  Top 0.152: U2.C2 v30.99,12.95
  Top 0.203: v24,13.97 v24,12.45 | v26.29,4.95 27.3,4.95 JP2.4
  Bottom 0.203: v30.99,12.95 30.99,15.62 30.35,16.26 26.54,16.26 24.26,13.97 v24,13.97 | v26.29,4.95 26.29,9.4 26.04,9.65 24.13,11.43 24,11.56 v24,12.45
!DRDY2  (via drill 0.38)  (1 unrouted)
  Top 0.152: U3.C2 v51.82,12.95
  Top 0.203: v44.83,13.97 v44.83,12.45 | v47.12,4.95 48.13,4.95 JP3.4
  Bottom 0.203: v51.82,12.95 51.82,15.62 51.18,16.26 47.37,16.26 45.09,13.97 v44.83,13.97 | v47.12,4.95 47.12,9.4 46.86,9.65 44.96,11.43 44.83,11.56 v44.83,12.45
!DRDY3  (via drill 0.38)  (1 unrouted)
  Top 0.152: U4.C2 v72.64,12.95
  Top 0.203: v65.66,13.97 v65.66,12.45 | v67.94,4.95 68.96,4.95 JP4.4
  Bottom 0.203: v72.64,12.95 72.64,15.62 72.01,16.26 68.2,16.26 65.91,13.97 v65.66,13.97 | v67.94,4.95 67.94,9.4 67.69,9.65 65.79,11.43 65.66,11.56 v65.66,12.45
!DRDY4  (via drill 0.38)  (1 unrouted)
  Top 0.152: U5.C2 v93.47,12.95
  Top 0.203: v86.49,13.97 v86.49,12.45 | v88.77,4.95 89.79,4.95 JP5.4
  Bottom 0.203: v93.47,12.95 93.47,15.62 92.84,16.26 89.03,16.26 86.74,13.97 v86.49,13.97 | v88.77,4.95 88.77,9.4 88.52,9.65 86.61,11.43 86.49,11.56 v86.49,12.45
!DRDY5  (via drill 0.38)  (1 unrouted)
  Top 0.152: U6.C2 v10.16,33.78
  Top 0.203: v3.17,34.8 v3.17,33.27 | v5.46,25.78 6.48,25.78 JP6.4
  Bottom 0.203: v10.16,33.78 10.16,36.45 9.53,37.08 5.71,37.08 3.43,34.8 v3.17,34.8 | v5.46,25.78 5.46,30.23 5.21,30.48 3.3,32.26 3.17,32.38 v3.17,33.27
!DRDY6  (via drill 0.38)  (1 unrouted)
  Top 0.152: U7.C2 v30.99,33.78
  Top 0.203: v24,34.8 v24,33.27 | v26.29,25.78 27.3,25.78 JP7.4
  Bottom 0.203: v30.99,33.78 30.99,36.45 30.35,37.08 26.54,37.08 24.26,34.8 v24,34.8 | v26.29,25.78 26.29,30.23 26.04,30.48 24.13,32.26 24,32.38 v24,33.27
!DRDY7  (via drill 0.38)  (1 unrouted)
  Top 0.152: U8.C2 v51.82,33.78
  Top 0.203: v44.83,34.8 v44.83,33.27 | v47.12,25.78 48.13,25.78 JP8.4
  Bottom 0.203: v51.82,33.78 51.82,36.45 51.18,37.08 47.37,37.08 45.09,34.8 v44.83,34.8 | v47.12,25.78 47.12,30.23 46.86,30.48 44.96,32.26 44.83,32.38 v44.83,33.27
!DRDY8  (via drill 0.38)  (1 unrouted)
  Top 0.152: U9.C2 v72.64,33.78
  Top 0.203: v65.66,34.8 v65.66,33.27 | v67.94,25.78 68.96,25.78 JP9.4
  Bottom 0.203: v72.64,33.78 72.64,36.45 72.01,37.08 68.2,37.08 65.91,34.8 v65.66,34.8 | v67.94,25.78 67.94,30.23 67.69,30.48 65.79,32.26 65.66,32.38 v65.66,33.27
!DRDY9  (via drill 0.38)  (1 unrouted)
  Top 0.152: U10.C2 v93.47,33.78
  Top 0.203: v86.49,34.8 v86.49,33.27 | v88.77,25.78 89.79,25.78 JP10.4
  Bottom 0.203: v93.47,33.78 93.47,36.45 92.84,37.08 89.03,37.08 86.74,34.8 v86.49,34.8 | v88.77,25.78 88.77,30.23 88.52,30.48 86.61,32.26 86.49,32.38 v86.49,33.27
!DRDY10  (via drill 0.38)  (1 unrouted)
  Top 0.152: U11.C2 v10.16,54.61
  Top 0.203: v3.17,55.63 v3.17,54.1 | v5.46,46.61 6.48,46.61 JP11.4
  Bottom 0.203: v10.16,54.61 10.16,57.28 9.53,57.91 5.71,57.91 3.43,55.63 v3.17,55.63 | v5.46,46.61 5.46,51.05 5.21,51.31 3.3,53.09 3.17,53.21 v3.17,54.1
!DRDY11  (via drill 0.38)  (1 unrouted)
  Top 0.152: U12.C2 v30.99,54.61
  Top 0.203: v24,55.63 v24,54.1 | v26.29,46.61 27.3,46.61 JP12.4
  Bottom 0.203: v30.99,54.61 30.99,57.28 30.35,57.91 26.54,57.91 24.26,55.63 v24,55.63 | v26.29,46.61 26.29,51.05 26.04,51.31 24.13,53.09 24,53.21 v24,54.1
!DRDY12  (via drill 0.38)  (1 unrouted)
  Top 0.152: U13.C2 v51.82,54.61
  Top 0.203: v44.83,55.63 v44.83,54.1 | v47.12,46.61 48.13,46.61 JP13.4
  Bottom 0.203: v51.82,54.61 51.82,57.28 51.18,57.91 47.37,57.91 45.09,55.63 v44.83,55.63 | v47.12,46.61 47.12,51.05 46.86,51.31 44.96,53.09 44.83,53.21 v44.83,54.1
!DRDY13  (via drill 0.38)  (1 unrouted)
  Top 0.152: U14.C2 v72.64,54.61
  Top 0.203: v65.66,55.63 v65.66,54.1 | v67.94,46.61 68.96,46.61 JP14.4
  Bottom 0.203: v72.64,54.61 72.64,57.28 72.01,57.91 68.2,57.91 65.91,55.63 v65.66,55.63 | v67.94,46.61 67.94,51.05 67.69,51.31 65.79,53.09 65.66,53.21 v65.66,54.1
!DRDY14  (via drill 0.38)  (1 unrouted)
  Top 0.152: U15.C2 v93.47,54.61
  Top 0.203: v86.49,55.63 v86.49,54.1 | v88.77,46.61 89.79,46.61 JP15.4
  Bottom 0.203: v93.47,54.61 93.47,57.28 92.84,57.91 89.03,57.91 86.74,55.63 v86.49,55.63 | v88.77,46.61 88.77,51.05 88.52,51.31 86.61,53.09 86.49,53.21 v86.49,54.1
!DRDY15  (via drill 0.38)  (1 unrouted)
  Top 0.152: U16.C2 v10.16,75.44
  Top 0.203: v3.17,76.45 v3.17,74.93 | v5.46,67.44 6.48,67.44 JP16.4
  Bottom 0.203: v10.16,75.44 10.16,78.11 9.53,78.74 5.71,78.74 3.43,76.45 v3.17,76.45 | v5.46,67.44 5.46,71.88 5.21,72.14 3.3,73.91 3.17,74.04 v3.17,74.93
!DRDY16  (via drill 0.38)  (1 unrouted)
  Top 0.152: U17.C2 v30.99,75.44
  Top 0.203: v24,76.45 v24,74.93 | v26.29,67.44 27.3,67.44 JP17.4
  Bottom 0.203: v30.99,75.44 30.99,78.11 30.35,78.74 26.54,78.74 24.26,76.45 v24,76.45 | v26.29,67.44 26.29,71.88 26.04,72.14 24.13,73.91 24,74.04 v24,74.93
!DRDY17  (via drill 0.38)  (1 unrouted)
  Top 0.152: U18.C2 v51.82,75.44
  Top 0.203: v44.83,76.45 v44.83,74.93 | v47.12,67.44 48.13,67.44 JP18.4
  Bottom 0.203: v51.82,75.44 51.82,78.11 51.18,78.74 47.37,78.74 45.09,76.45 v44.83,76.45 | v47.12,67.44 47.12,71.88 46.86,72.14 44.96,73.91 44.83,74.04 v44.83,74.93
!DRDY18  (via drill 0.38)  (1 unrouted)
  Top 0.152: U19.C2 v72.64,75.44
  Top 0.203: v65.66,76.45 v65.66,74.93 | v67.94,67.44 68.96,67.44 JP19.4
  Bottom 0.203: v72.64,75.44 72.64,78.11 72.01,78.74 68.2,78.74 65.91,76.45 v65.66,76.45 | v67.94,67.44 67.94,71.88 67.69,72.14 65.79,73.91 65.66,74.04 v65.66,74.93
!DRDY19  (via drill 0.38)  (1 unrouted)
  Top 0.152: U20.C2 v93.47,75.44
  Top 0.203: v86.49,76.45 v86.49,74.93 | v88.77,67.44 89.79,67.44 JP20.4
  Bottom 0.203: v93.47,75.44 93.47,78.11 92.84,78.74 89.03,78.74 86.74,76.45 v86.49,76.45 | v88.77,67.44 88.77,71.88 88.52,72.14 86.61,73.91 86.49,74.04 v86.49,74.93
!DRDY20  (via drill 0.38)  (1 unrouted)
  Top 0.152: U21.C2 v10.16,96.27
  Top 0.203: v3.17,97.28 v3.17,95.76 | v5.46,88.27 6.48,88.27 JP21.4
  Bottom 0.203: v10.16,96.27 10.16,98.93 9.53,99.57 5.71,99.57 3.43,97.28 v3.17,97.28 | v5.46,88.27 5.46,92.71 5.21,92.96 3.3,94.74 3.17,94.87 v3.17,95.76
!DRDY21  (via drill 0.38)  (1 unrouted)
  Top 0.152: U22.C2 v30.99,96.27
  Top 0.203: v24,97.28 v24,95.76 | v26.29,88.27 27.3,88.27 JP22.4
  Bottom 0.203: v30.99,96.27 30.99,98.93 30.35,99.57 26.54,99.57 24.26,97.28 v24,97.28 | v26.29,88.27 26.29,92.71 26.04,92.96 24.13,94.74 24,94.87 v24,95.76
!DRDY22  (via drill 0.38)  (1 unrouted)
  Top 0.152: U23.C2 v51.82,96.27
  Top 0.203: v44.83,97.28 v44.83,95.76 | v47.12,88.27 48.13,88.27 JP23.4
  Bottom 0.203: v51.82,96.27 51.82,98.93 51.18,99.57 47.37,99.57 45.09,97.28 v44.83,97.28 | v47.12,88.27 47.12,92.71 46.86,92.96 44.96,94.74 44.83,94.87 v44.83,95.76
!DRDY23  (via drill 0.38)  (1 unrouted)
  Top 0.152: U24.C2 v72.64,96.27
  Top 0.203: v65.66,97.28 v65.66,95.76 | v67.94,88.27 68.96,88.27 JP24.4
  Bottom 0.203: v72.64,96.27 72.64,98.93 72.01,99.57 68.2,99.57 65.91,97.28 v65.66,97.28 | v67.94,88.27 67.94,92.71 67.69,92.96 65.79,94.74 65.66,94.87 v65.66,95.76
!DRDY24  (via drill 0.38)  (1 unrouted)
  Top 0.152: U25.C2 v93.47,96.27
  Top 0.203: v86.49,97.28 v86.49,95.76 | v88.77,88.27 89.79,88.27 JP25.4
  Bottom 0.203: v93.47,96.27 93.47,98.93 92.84,99.57 89.03,99.57 86.74,97.28 v86.49,97.28 | v88.77,88.27 88.77,92.71 88.52,92.96 86.61,94.74 86.49,94.87 v86.49,95.76
ADR0  (via drill 0.38)
  Top 0.152: U1.C1 10.66,12.31 11.3,12.95 v11.68,12.95
  Top 0.203: JP1.6 15.24,5.84 v15.62,6.22 | v15.62,8.89 R4.2
  Bottom 0.203: v11.68,12.95 11.68,15.24 12.45,16 14.1,16 16.64,13.46 16.64,13.08 16.64,9.78 v15.62,8.89 v15.62,6.22
ADR1  (via drill 0.38)
  Top 0.152: U1.B1 v11.68,11.43
  Top 0.203: v14.86,11.43 14.86,8 15.24,7.62 | JP1.5 12.7,5.08 15.24,7.62 | R5.2 15.75,7.11 15.24,7.62
  Bottom 0.203: v11.68,11.43 v14.86,11.43
ADR2  (via drill 0.38)
  Top 0.152: U2.C1 31.49,12.31 32.13,12.95 v32.51,12.95
  Top 0.203: JP2.6 36.07,5.84 v36.45,6.22 | v36.45,8.89 R9.2
  Bottom 0.203: v32.51,12.95 32.51,15.24 33.27,16 34.92,16 37.47,13.46 37.47,13.08 37.47,9.78 v36.45,8.89 v36.45,6.22
ADR3  (via drill 0.38)
  Top 0.152: U2.B1 v32.51,11.43
  Top 0.203: v35.69,11.43 35.69,8 36.07,7.62 | JP2.5 33.53,5.08 36.07,7.62 | R10.2 36.58,7.11 36.07,7.62
  Bottom 0.203: v32.51,11.43 v35.69,11.43
ADR4  (via drill 0.38)
  Top 0.152: U3.C1 52.32,12.31 52.96,12.95 v53.34,12.95
  Top 0.203: JP3.6 56.9,5.84 v57.28,6.22 | v57.28,8.89 R14.2
  Bottom 0.203: v53.34,12.95 53.34,15.24 54.1,16 55.75,16 58.29,13.46 58.29,13.08 58.29,9.78 v57.28,8.89 v57.28,6.22
ADR5  (via drill 0.38)
  Top 0.152: U3.B1 v53.34,11.43
  Top 0.203: v56.52,11.43 56.52,8 56.9,7.62 | JP3.5 54.36,5.08 56.9,7.62 | R15.2 57.4,7.11 56.9,7.62
  Bottom 0.203: v53.34,11.43 v56.52,11.43
ADR6  (via drill 0.38)
  Top 0.152: U4.C1 73.14,12.31 73.79,12.95 v74.17,12.95
  Top 0.203: JP4.6 77.72,5.84 v78.11,6.22 | v78.11,8.89 R19.2
  Bottom 0.203: v74.17,12.95 74.17,15.24 74.93,16 76.58,16 79.12,13.46 79.12,13.08 79.12,9.78 v78.11,8.89 v78.11,6.22
ADR7  (via drill 0.38)
  Top 0.152: U4.B1 v74.17,11.43
  Top 0.203: v77.34,11.43 77.34,8 77.72,7.62 | JP4.5 75.18,5.08 77.72,7.62 | R20.2 78.23,7.11 77.72,7.62
  Bottom 0.203: v74.17,11.43 v77.34,11.43
ADR8  (via drill 0.38)
  Top 0.152: U5.C1 93.97,12.31 94.61,12.95 v95,12.95
  Top 0.203: JP5.6 98.55,5.84 v98.93,6.22 | v98.93,8.89 R24.2
  Bottom 0.203: v95,12.95 95,15.24 95.76,16 97.41,16 99.95,13.46 99.95,13.08 99.95,9.78 v98.93,8.89 v98.93,6.22
ADR9  (via drill 0.38)
  Top 0.152: U5.B1 v95,11.43
  Top 0.203: v98.17,11.43 98.17,8 98.55,7.62 | JP5.5 96.01,5.08 98.55,7.62 | R25.2 99.06,7.11 98.55,7.62
  Bottom 0.203: v95,11.43 v98.17,11.43
ADR10  (via drill 0.38)
  Top 0.152: U6.C1 10.66,33.14 11.3,33.78 v11.68,33.78
  Top 0.203: JP6.6 15.24,26.67 v15.62,27.05 | v15.62,29.72 R29.2
  Bottom 0.203: v11.68,33.78 11.68,36.07 12.45,36.83 14.1,36.83 16.64,34.29 16.64,33.91 16.64,30.61 v15.62,29.72 v15.62,27.05
ADR11  (via drill 0.38)
  Top 0.152: U6.B1 v11.68,32.26
  Top 0.203: v14.86,32.26 14.86,28.83 15.24,28.45 | JP6.5 12.7,25.91 15.24,28.45 | R30.2 15.75,27.94 15.24,28.45
  Bottom 0.203: v11.68,32.26 v14.86,32.26
ADR12  (via drill 0.38)
  Top 0.152: U7.C1 31.49,33.14 32.13,33.78 v32.51,33.78
  Top 0.203: JP7.6 36.07,26.67 v36.45,27.05 | v36.45,29.72 R34.2
  Bottom 0.203: v32.51,33.78 32.51,36.07 33.27,36.83 34.92,36.83 37.47,34.29 37.47,33.91 37.47,30.61 v36.45,29.72 v36.45,27.05
ADR13  (via drill 0.38)
  Top 0.152: U7.B1 v32.51,32.26
  Top 0.203: v35.69,32.26 35.69,28.83 36.07,28.45 | JP7.5 33.53,25.91 36.07,28.45 | R35.2 36.58,27.94 36.07,28.45
  Bottom 0.203: v32.51,32.26 v35.69,32.26
ADR14  (via drill 0.38)
  Top 0.152: U8.C1 52.32,33.14 52.96,33.78 v53.34,33.78
  Top 0.203: JP8.6 56.9,26.67 v57.28,27.05 | v57.28,29.72 R39.2
  Bottom 0.203: v53.34,33.78 53.34,36.07 54.1,36.83 55.75,36.83 58.29,34.29 58.29,33.91 58.29,30.61 v57.28,29.72 v57.28,27.05
ADR15  (via drill 0.38)
  Top 0.152: U8.B1 v53.34,32.26
  Top 0.203: v56.52,32.26 56.52,28.83 56.9,28.45 | JP8.5 54.36,25.91 56.9,28.45 | R40.2 57.4,27.94 56.9,28.45
  Bottom 0.203: v53.34,32.26 v56.52,32.26
ADR16  (via drill 0.38)
  Top 0.152: U9.C1 73.14,33.14 73.79,33.78 v74.17,33.78
  Top 0.203: JP9.6 77.72,26.67 v78.11,27.05 | v78.11,29.72 R44.2
  Bottom 0.203: v74.17,33.78 74.17,36.07 74.93,36.83 76.58,36.83 79.12,34.29 79.12,33.91 79.12,30.61 v78.11,29.72 v78.11,27.05
ADR17  (via drill 0.38)
  Top 0.152: U9.B1 v74.17,32.26
  Top 0.203: v77.34,32.26 77.34,28.83 77.72,28.45 | JP9.5 75.18,25.91 77.72,28.45 | R45.2 78.23,27.94 77.72,28.45
  Bottom 0.203: v74.17,32.26 v77.34,32.26
ADR18  (via drill 0.38)
  Top 0.152: U10.C1 93.97,33.14 94.61,33.78 v95,33.78
  Top 0.203: JP10.6 98.55,26.67 v98.93,27.05 | v98.93,29.72 R49.2
  Bottom 0.203: v95,33.78 95,36.07 95.76,36.83 97.41,36.83 99.95,34.29 99.95,33.91 99.95,30.61 v98.93,29.72 v98.93,27.05
ADR19  (via drill 0.38)
  Top 0.152: U10.B1 v95,32.26
  Top 0.203: v98.17,32.26 98.17,28.83 98.55,28.45 | JP10.5 96.01,25.91 98.55,28.45 | R50.2 99.06,27.94 98.55,28.45
  Bottom 0.203: v95,32.26 v98.17,32.26
ADR20  (via drill 0.38)
  Top 0.152: U11.C1 10.66,53.97 11.3,54.61 v11.68,54.61
  Top 0.203: JP11.6 15.24,47.5 v15.62,47.88 | v15.62,50.55 R54.2
  Bottom 0.203: v11.68,54.61 11.68,56.9 12.45,57.66 14.1,57.66 16.64,55.12 16.64,54.74 16.64,51.44 v15.62,50.55 v15.62,47.88
ADR21  (via drill 0.38)
  Top 0.152: U11.B1 v11.68,53.09
  Top 0.203: v14.86,53.09 14.86,49.66 15.24,49.28 | JP11.5 12.7,46.74 15.24,49.28 | R55.2 15.75,48.77 15.24,49.28
  Bottom 0.203: v11.68,53.09 v14.86,53.09
ADR22  (via drill 0.38)
  Top 0.152: U12.C1 31.49,53.97 32.13,54.61 v32.51,54.61
  Top 0.203: JP12.6 36.07,47.5 v36.45,47.88 | v36.45,50.55 R59.2
  Bottom 0.203: v32.51,54.61 32.51,56.9 33.27,57.66 34.92,57.66 37.47,55.12 37.47,54.74 37.47,51.44 v36.45,50.55 v36.45,47.88
ADR23  (via drill 0.38)
  Top 0.152: U12.B1 v32.51,53.09
  Top 0.203: v35.69,53.09 35.69,49.66 36.07,49.28 | JP12.5 33.53,46.74 36.07,49.28 | R60.2 36.58,48.77 36.07,49.28
  Bottom 0.203: v32.51,53.09 v35.69,53.09
ADR24  (via drill 0.38)
  Top 0.152: U13.C1 52.32,53.97 52.96,54.61 v53.34,54.61
  Top 0.203: JP13.6 56.9,47.5 v57.28,47.88 | v57.28,50.55 R64.2
  Bottom 0.203: v53.34,54.61 53.34,56.9 54.1,57.66 55.75,57.66 58.29,55.12 58.29,54.74 58.29,51.44 v57.28,50.55 v57.28,47.88
ADR25  (via drill 0.38)
  Top 0.152: U13.B1 v53.34,53.09
  Top 0.203: v56.52,53.09 56.52,49.66 56.9,49.28 | JP13.5 54.36,46.74 56.9,49.28 | R65.2 57.4,48.77 56.9,49.28
  Bottom 0.203: v53.34,53.09 v56.52,53.09
ADR26  (via drill 0.38)
  Top 0.152: U14.C1 73.14,53.97 73.79,54.61 v74.17,54.61
  Top 0.203: JP14.6 77.72,47.5 v78.11,47.88 | v78.11,50.55 R69.2
  Bottom 0.203: v74.17,54.61 74.17,56.9 74.93,57.66 76.58,57.66 79.12,55.12 79.12,54.74 79.12,51.44 v78.11,50.55 v78.11,47.88
ADR27  (via drill 0.38)
  Top 0.152: U14.B1 v74.17,53.09
  Top 0.203: v77.34,53.09 77.34,49.66 77.72,49.28 | JP14.5 75.18,46.74 77.72,49.28 | R70.2 78.23,48.77 77.72,49.28
  Bottom 0.203: v74.17,53.09 v77.34,53.09
ADR28  (via drill 0.38)
  Top 0.152: U15.C1 93.97,53.97 94.61,54.61 v95,54.61
  Top 0.203: JP15.6 98.55,47.5 v98.93,47.88 | v98.93,50.55 R74.2
  Bottom 0.203: v95,54.61 95,56.9 95.76,57.66 97.41,57.66 99.95,55.12 99.95,54.74 99.95,51.44 v98.93,50.55 v98.93,47.88
ADR29  (via drill 0.38)
  Top 0.152: U15.B1 v95,53.09
  Top 0.203: v98.17,53.09 98.17,49.66 98.55,49.28 | JP15.5 96.01,46.74 98.55,49.28 | R75.2 99.06,48.77 98.55,49.28
  Bottom 0.203: v95,53.09 v98.17,53.09
ADR30  (via drill 0.38)
  Top 0.152: U16.C1 10.66,74.8 11.3,75.44 v11.68,75.44
  Top 0.203: JP16.6 15.24,68.33 v15.62,68.71 | v15.62,71.37 R79.2
  Bottom 0.203: v11.68,75.44 11.68,77.72 12.45,78.49 14.1,78.49 16.64,75.95 16.64,75.56 16.64,72.26 v15.62,71.37 v15.62,68.71
ADR31  (via drill 0.38)
  Top 0.152: U16.B1 v11.68,73.91
  Top 0.203: v14.86,73.91 14.86,70.48 15.24,70.1 | JP16.5 12.7,67.56 15.24,70.1 | R80.2 15.75,69.6 15.24,70.1
  Bottom 0.203: v11.68,73.91 v14.86,73.91
ADR32  (via drill 0.38)
  Top 0.152: U17.C1 31.49,74.8 32.13,75.44 v32.51,75.44
  Top 0.203: JP17.6 36.07,68.33 v36.45,68.71 | v36.45,71.37 R84.2
  Bottom 0.203: v32.51,75.44 32.51,77.72 33.27,78.49 34.92,78.49 37.47,75.95 37.47,75.56 37.47,72.26 v36.45,71.37 v36.45,68.71
ADR33  (via drill 0.38)
  Top 0.152: U17.B1 v32.51,73.91
  Top 0.203: v35.69,73.91 35.69,70.48 36.07,70.1 | JP17.5 33.53,67.56 36.07,70.1 | R85.2 36.58,69.6 36.07,70.1
  Bottom 0.203: v32.51,73.91 v35.69,73.91
ADR34  (via drill 0.38)
  Top 0.152: U18.C1 52.32,74.8 52.96,75.44 v53.34,75.44
  Top 0.203: JP18.6 56.9,68.33 v57.28,68.71 | v57.28,71.37 R89.2
  Bottom 0.203: v53.34,75.44 53.34,77.72 54.1,78.49 55.75,78.49 58.29,75.95 58.29,75.56 58.29,72.26 v57.28,71.37 v57.28,68.71
ADR35  (via drill 0.38)
  Top 0.152: U18.B1 v53.34,73.91
  Top 0.203: v56.52,73.91 56.52,70.48 56.9,70.1 | JP18.5 54.36,67.56 56.9,70.1 | R90.2 57.4,69.6 56.9,70.1
  Bottom 0.203: v53.34,73.91 v56.52,73.91
ADR36  (via drill 0.38)
  Top 0.152: U19.C1 73.14,74.8 73.79,75.44 v74.17,75.44
  Top 0.203: JP19.6 77.72,68.33 v78.11,68.71 | v78.11,71.37 R94.2
  Bottom 0.203: v74.17,75.44 74.17,77.72 74.93,78.49 76.58,78.49 79.12,75.95 79.12,75.56 79.12,72.26 v78.11,71.37 v78.11,68.71
ADR37  (via drill 0.38)
  Top 0.152: U19.B1 v74.17,73.91
  Top 0.203: v77.34,73.91 77.34,70.48 77.72,70.1 | JP19.5 75.18,67.56 77.72,70.1 | R95.2 78.23,69.6 77.72,70.1
  Bottom 0.203: v74.17,73.91 v77.34,73.91
ADR38  (via drill 0.38)
  Top 0.152: U20.C1 93.97,74.8 94.61,75.44 v95,75.44
  Top 0.203: JP20.6 98.55,68.33 v98.93,68.71 | v98.93,71.37 R99.2
  Bottom 0.203: v95,75.44 95,77.72 95.76,78.49 97.41,78.49 99.95,75.95 99.95,75.56 99.95,72.26 v98.93,71.37 v98.93,68.71
ADR39  (via drill 0.38)
  Top 0.152: U20.B1 v95,73.91
  Top 0.203: v98.17,73.91 98.17,70.48 98.55,70.1 | JP20.5 96.01,67.56 98.55,70.1 | R100.2 99.06,69.6 98.55,70.1
  Bottom 0.203: v95,73.91 v98.17,73.91
ADR40  (via drill 0.38)
  Top 0.152: U21.C1 10.66,95.62 11.3,96.27 v11.68,96.27
  Top 0.203: JP21.6 15.24,89.15 v15.62,89.53 | v15.62,92.2 R104.2
  Bottom 0.203: v11.68,96.27 11.68,98.55 12.45,99.31 14.1,99.31 16.64,96.77 16.64,96.39 16.64,93.09 v15.62,92.2 v15.62,89.53
ADR41  (via drill 0.38)
  Top 0.152: U21.B1 v11.68,94.74
  Top 0.203: v14.86,94.74 14.86,91.31 15.24,90.93 | JP21.5 12.7,88.39 15.24,90.93 | R105.2 15.75,90.42 15.24,90.93
  Bottom 0.203: v11.68,94.74 v14.86,94.74
ADR42  (via drill 0.38)
  Top 0.152: U22.C1 31.49,95.62 32.13,96.27 v32.51,96.27
  Top 0.203: JP22.6 36.07,89.15 v36.45,89.53 | v36.45,92.2 R109.2
  Bottom 0.203: v32.51,96.27 32.51,98.55 33.27,99.31 34.92,99.31 37.47,96.77 37.47,96.39 37.47,93.09 v36.45,92.2 v36.45,89.53
ADR43  (via drill 0.38)
  Top 0.152: U22.B1 v32.51,94.74
  Top 0.203: v35.69,94.74 35.69,91.31 36.07,90.93 | JP22.5 33.53,88.39 36.07,90.93 | R110.2 36.58,90.42 36.07,90.93
  Bottom 0.203: v32.51,94.74 v35.69,94.74
ADR44  (via drill 0.38)
  Top 0.152: U23.C1 52.32,95.62 52.96,96.27 v53.34,96.27
  Top 0.203: JP23.6 56.9,89.15 v57.28,89.53 | v57.28,92.2 R114.2
  Bottom 0.203: v53.34,96.27 53.34,98.55 54.1,99.31 55.75,99.31 58.29,96.77 58.29,96.39 58.29,93.09 v57.28,92.2 v57.28,89.53
ADR45  (via drill 0.38)
  Top 0.152: U23.B1 v53.34,94.74
  Top 0.203: v56.52,94.74 56.52,91.31 56.9,90.93 | JP23.5 54.36,88.39 56.9,90.93 | R115.2 57.4,90.42 56.9,90.93
  Bottom 0.203: v53.34,94.74 v56.52,94.74
ADR46  (via drill 0.38)
  Top 0.152: U24.C1 73.14,95.62 73.79,96.27 v74.17,96.27
  Top 0.203: JP24.6 77.72,89.15 v78.11,89.53 | v78.11,92.2 R119.2
  Bottom 0.203: v74.17,96.27 74.17,98.55 74.93,99.31 76.58,99.31 79.12,96.77 79.12,96.39 79.12,93.09 v78.11,92.2 v78.11,89.53
ADR47  (via drill 0.38)
  Top 0.152: U24.B1 v74.17,94.74
  Top 0.203: v77.34,94.74 77.34,91.31 77.72,90.93 | JP24.5 75.18,88.39 77.72,90.93 | R120.2 78.23,90.42 77.72,90.93
  Bottom 0.203: v74.17,94.74 v77.34,94.74
ADR48  (via drill 0.38)
  Top 0.152: U25.C1 93.97,95.62 94.61,96.27 v95,96.27
  Top 0.203: JP25.6 98.55,89.15 v98.93,89.53 | v98.93,92.2 R124.2
  Bottom 0.203: v95,96.27 95,98.55 95.76,99.31 97.41,99.31 99.95,96.77 99.95,96.39 99.95,93.09 v98.93,92.2 v98.93,89.53
ADR49  (via drill 0.38)
  Top 0.152: U25.B1 v95,94.74
  Top 0.203: v98.17,94.74 98.17,91.31 98.55,90.93 | JP25.5 96.01,88.39 98.55,90.93 | R125.2 99.06,90.42 98.55,90.93
  Bottom 0.203: v95,94.74 v98.17,94.74
GND  (via drill 0.38)
  Top 0.152: U1.A1 10.66,10.29 11.05,9.91 v11.68,9.91 | U1.A2 v10.16,9.91 | 18.41,7.61 R5.1
  Top 0.203: JP1.7 17.78,5.97 | 18.63,6.82 R5.1
  Top 0.254: v11.18,6.35 C1.2
  Bottom 0.254: v10.16,9.91 10.16,7.11 v11.18,6.35
  pour Top: 7.87,9.14 7.87,13.72 12.45,13.72 12.45,9.14
  pour Top (isolate 0.305): 0,7.62 0,0 20.32,0 20.32,20.32 0,20.32 0,7.87 6.35,7.87 6.35,15.24 13.97,15.24 13.97,7.62
  pour Bottom (isolate 0.305): 0,7.62 0,0 20.32,0 20.32,20.32 0,20.32 0,7.87 6.35,7.87 6.35,15.24 13.97,15.24 13.97,7.62
  pour Bottom: 7.87,13.72 12.45,13.72 12.45,9.14 7.87,9.14
GND1  (via drill 0.38)
  Top 0.152: U2.A1 31.49,10.29 31.88,9.91 v32.51,9.91 | U2.A2 v30.99,9.91 | 39.24,7.61 R10.1
  Top 0.203: JP2.7 38.61,5.97 | 39.46,6.82 R10.1
  Top 0.254: v32,6.35 C2.2
  Bottom 0.254: v30.99,9.91 30.99,7.11 v32,6.35
  pour Top: 28.7,9.14 28.7,13.72 33.27,13.72 33.27,9.14
  pour Top (isolate 0.305): 20.83,7.62 20.83,0 41.15,0 41.15,20.32 20.83,20.32 20.83,7.87 27.18,7.87 27.18,15.24 34.8,15.24 34.8,7.62
  pour Bottom (isolate 0.305): 20.83,7.62 20.83,0 41.15,0 41.15,20.32 20.83,20.32 20.83,7.87 27.18,7.87 27.18,15.24 34.8,15.24 34.8,7.62
  pour Bottom: 28.7,13.72 33.27,13.72 33.27,9.14 28.7,9.14
GND2  (via drill 0.38)
  Top 0.152: U3.A1 52.32,10.29 52.7,9.91 v53.34,9.91 | U3.A2 v51.82,9.91 | 60.07,7.61 R15.1
  Top 0.203: JP3.7 59.44,5.97 | 60.29,6.82 R15.1
  Top 0.254: v52.83,6.35 C3.2
  Bottom 0.254: v51.82,9.91 51.82,7.11 v52.83,6.35
  pour Top: 49.53,9.14 49.53,13.72 54.1,13.72 54.1,9.14
  pour Top (isolate 0.305): 41.66,7.62 41.66,0 61.98,0 61.98,20.32 41.66,20.32 41.66,7.87 48.01,7.87 48.01,15.24 55.63,15.24 55.63,7.62
  pour Bottom (isolate 0.305): 41.66,7.62 41.66,0 61.98,0 61.98,20.32 41.66,20.32 41.66,7.87 48.01,7.87 48.01,15.24 55.63,15.24 55.63,7.62
  pour Bottom: 49.53,13.72 54.1,13.72 54.1,9.14 49.53,9.14
GND3  (via drill 0.38)
  Top 0.152: U4.A1 73.14,10.29 73.53,9.91 v74.17,9.91 | U4.A2 v72.64,9.91 | 80.9,7.61 R20.1
  Top 0.203: JP4.7 80.26,5.97 | 81.11,6.82 R20.1
  Top 0.254: v73.66,6.35 C4.2
  Bottom 0.254: v72.64,9.91 72.64,7.11 v73.66,6.35
  pour Top: 70.36,9.14 70.36,13.72 74.93,13.72 74.93,9.14
  pour Top (isolate 0.305): 62.48,7.62 62.48,0 82.8,0 82.8,20.32 62.48,20.32 62.48,7.87 68.83,7.87 68.83,15.24 76.45,15.24 76.45,7.62
  pour Bottom (isolate 0.305): 62.48,7.62 62.48,0 82.8,0 82.8,20.32 62.48,20.32 62.48,7.87 68.83,7.87 68.83,15.24 76.45,15.24 76.45,7.62
  pour Bottom: 70.36,13.72 74.93,13.72 74.93,9.14 70.36,9.14
GND4  (via drill 0.38)
  Top 0.152: U5.A1 93.97,10.29 94.36,9.91 v95,9.91 | U5.A2 v93.47,9.91 | 101.73,7.61 R25.1
  Top 0.203: JP5.7 101.09,5.97 | 101.94,6.82 R25.1
  Top 0.254: v94.49,6.35 C5.2
  Bottom 0.254: v93.47,9.91 93.47,7.11 v94.49,6.35
  pour Top: 91.19,9.14 91.19,13.72 95.76,13.72 95.76,9.14
  pour Top (isolate 0.305): 83.31,7.62 83.31,0 103.63,0 103.63,20.32 83.31,20.32 83.31,7.87 89.66,7.87 89.66,15.24 97.28,15.24 97.28,7.62
  pour Bottom (isolate 0.305): 83.31,7.62 83.31,0 103.63,0 103.63,20.32 83.31,20.32 83.31,7.87 89.66,7.87 89.66,15.24 97.28,15.24 97.28,7.62
  pour Bottom: 91.19,13.72 95.76,13.72 95.76,9.14 91.19,9.14
GND5  (via drill 0.38)
  Top 0.152: U6.A1 10.66,31.12 11.05,30.73 v11.68,30.73 | U6.A2 v10.16,30.73 | 18.41,28.43 R30.1
  Top 0.203: JP6.7 17.78,26.8 | 18.63,27.65 R30.1
  Top 0.254: v11.18,27.18 C6.2
  Bottom 0.254: v10.16,30.73 10.16,27.94 v11.18,27.18
  pour Top: 7.87,29.97 7.87,34.54 12.45,34.54 12.45,29.97
  pour Top (isolate 0.305): 0,28.45 0,20.83 20.32,20.83 20.32,41.15 0,41.15 0,28.7 6.35,28.7 6.35,36.07 13.97,36.07 13.97,28.45
  pour Bottom (isolate 0.305): 0,28.45 0,20.83 20.32,20.83 20.32,41.15 0,41.15 0,28.7 6.35,28.7 6.35,36.07 13.97,36.07 13.97,28.45
  pour Bottom: 7.87,34.54 12.45,34.54 12.45,29.97 7.87,29.97
GND6  (via drill 0.38)
  Top 0.152: U7.A1 31.49,31.12 31.88,30.73 v32.51,30.73 | U7.A2 v30.99,30.73 | 39.24,28.43 R35.1
  Top 0.203: JP7.7 38.61,26.8 | 39.46,27.65 R35.1
  Top 0.254: v32,27.18 C7.2
  Bottom 0.254: v30.99,30.73 30.99,27.94 v32,27.18
  pour Top: 28.7,29.97 28.7,34.54 33.27,34.54 33.27,29.97
  pour Top (isolate 0.305): 20.83,28.45 20.83,20.83 41.15,20.83 41.15,41.15 20.83,41.15 20.83,28.7 27.18,28.7 27.18,36.07 34.8,36.07 34.8,28.45
  pour Bottom (isolate 0.305): 20.83,28.45 20.83,20.83 41.15,20.83 41.15,41.15 20.83,41.15 20.83,28.7 27.18,28.7 27.18,36.07 34.8,36.07 34.8,28.45
  pour Bottom: 28.7,34.54 33.27,34.54 33.27,29.97 28.7,29.97
GND7  (via drill 0.38)
  Top 0.152: U8.A1 52.32,31.12 52.7,30.73 v53.34,30.73 | U8.A2 v51.82,30.73 | 60.07,28.43 R40.1
  Top 0.203: JP8.7 59.44,26.8 | 60.29,27.65 R40.1
  Top 0.254: v52.83,27.18 C8.2
  Bottom 0.254: v51.82,30.73 51.82,27.94 v52.83,27.18
  pour Top: 49.53,29.97 49.53,34.54 54.1,34.54 54.1,29.97